# Altium PCB barricelli.PcbDoc (part 4 of 5)
Units mm, origin at the board's own origin, x right, y up, seen from the top; angles counter-clockwise.
Board outline 153 x 153 mm, 8 copper layers (Top Layer, PWR, Mid-Layer 1, Mid-Layer 2, Mid-Layer 3, Mid-Layer 4, GND, Bottom Layer); 168 components, 427 nets, 1233 pads, 911 vias.
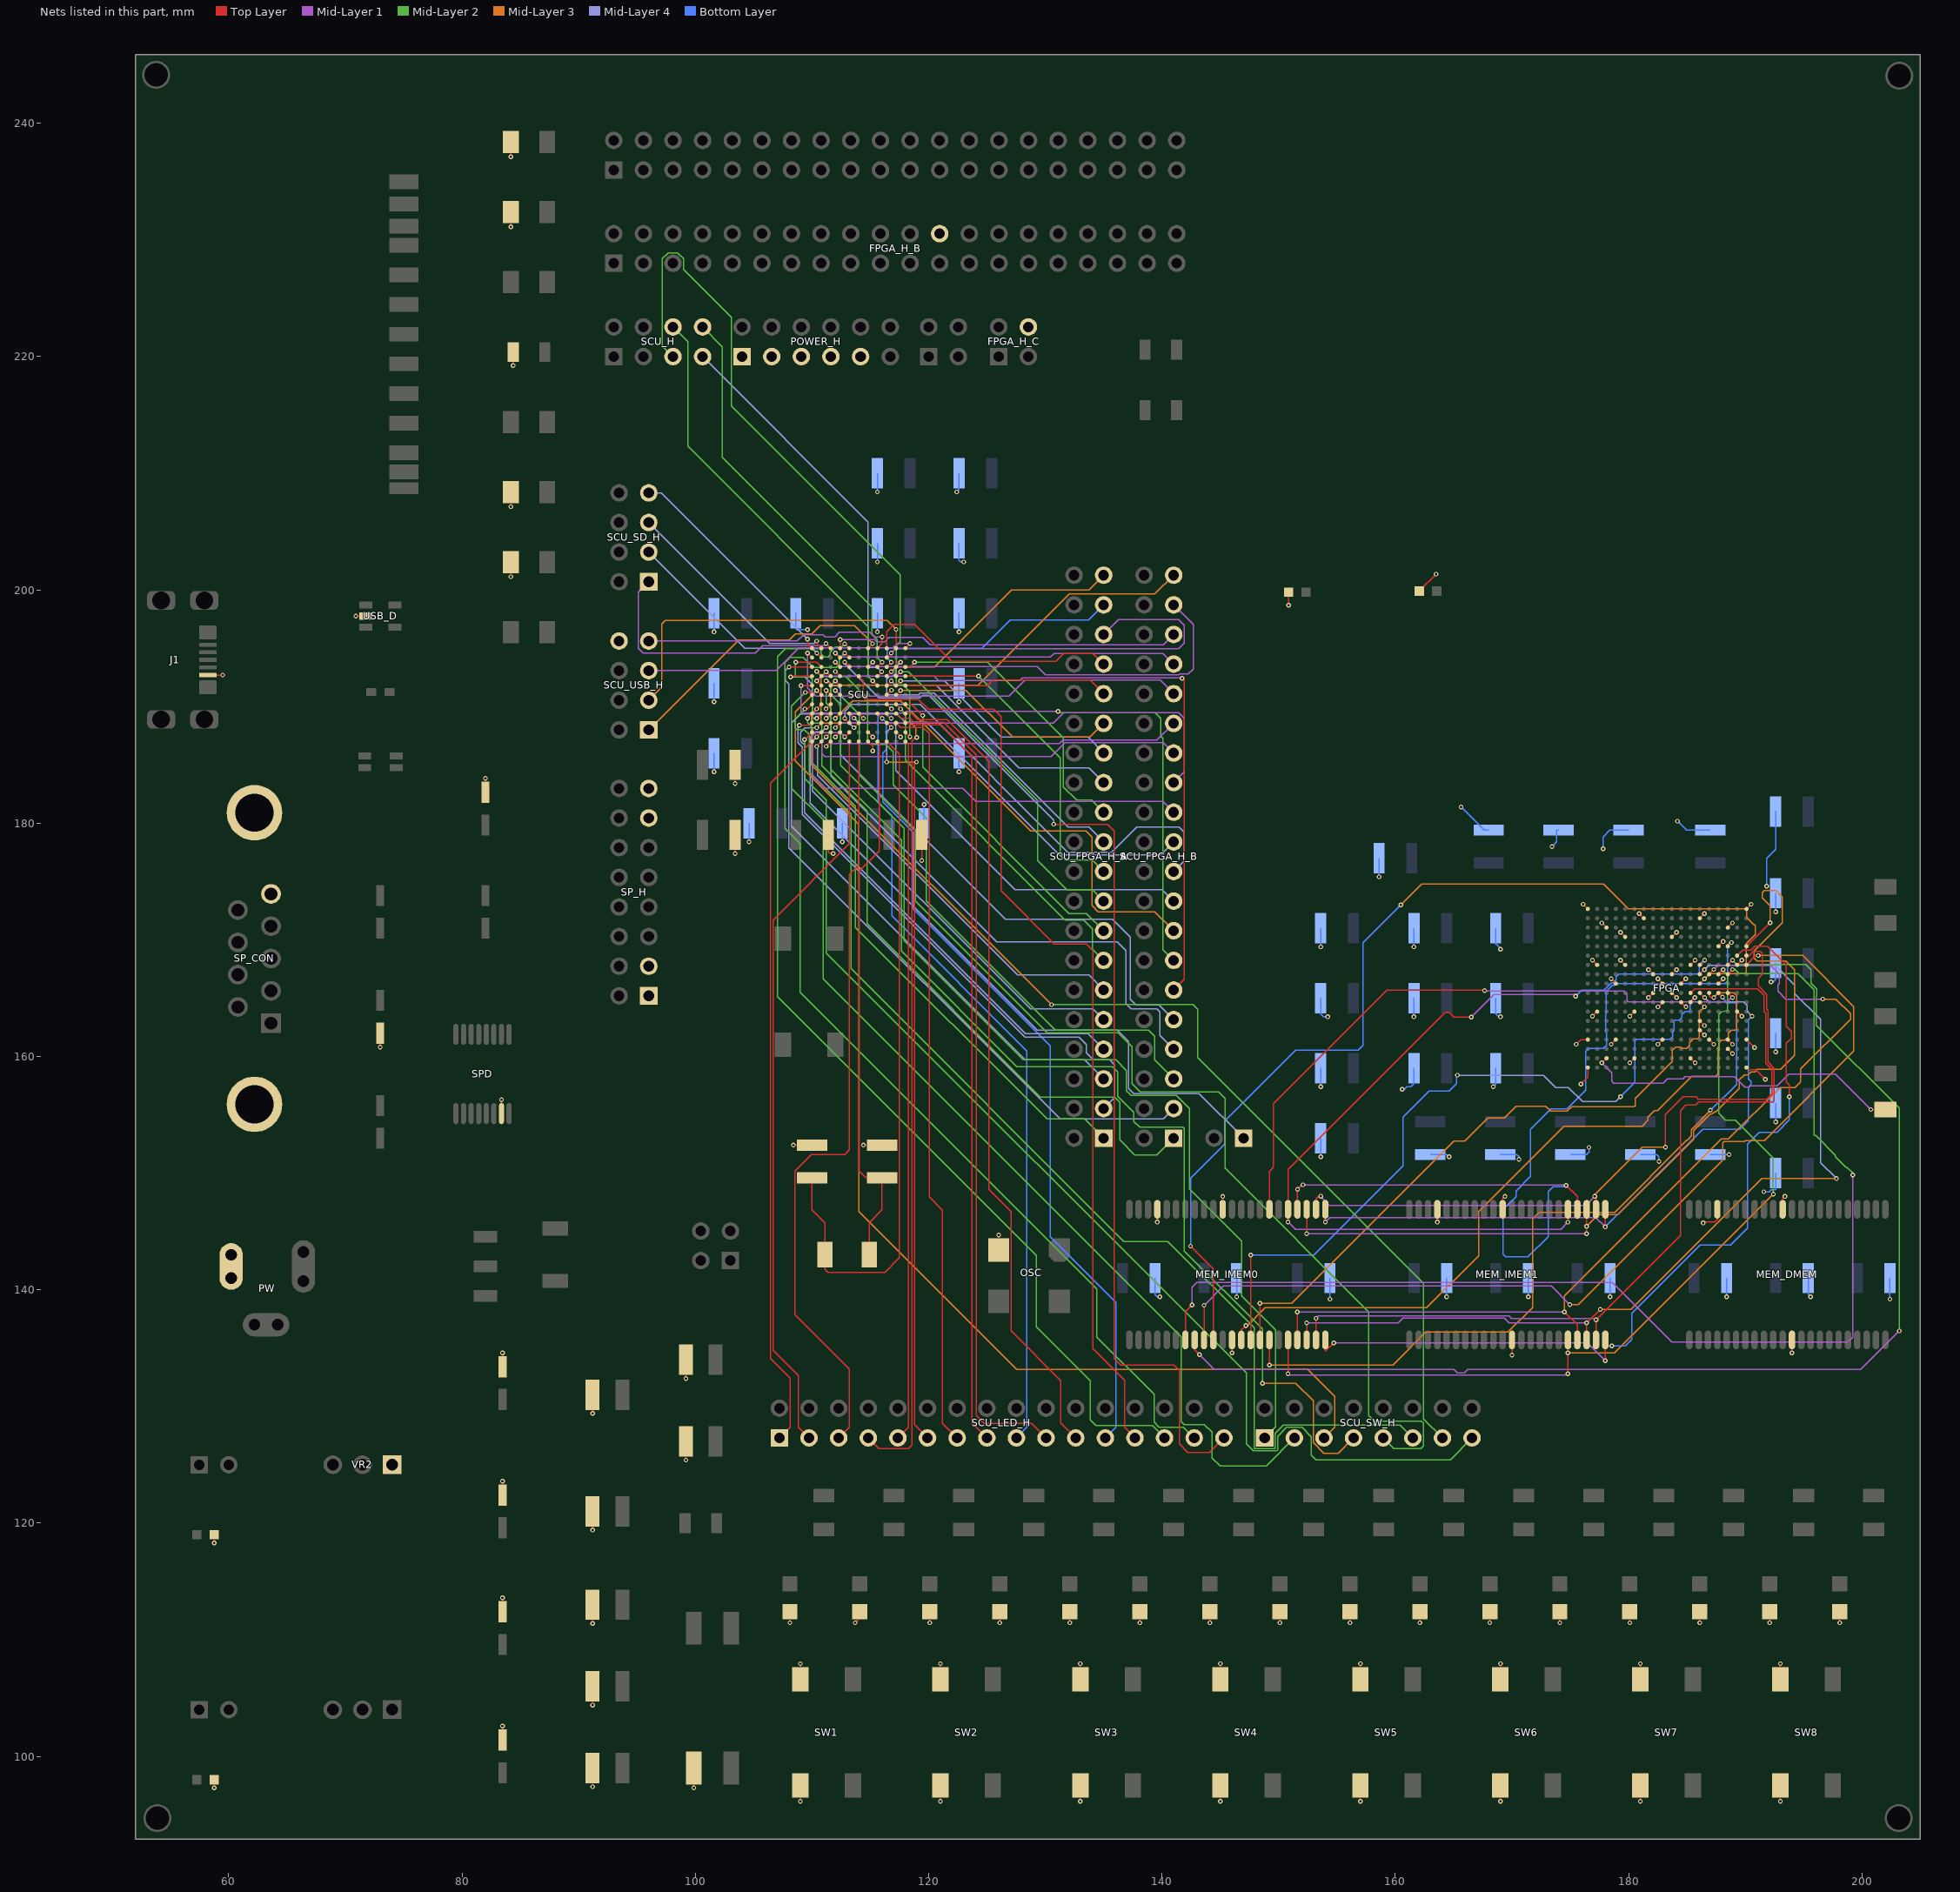
[diagram p10: the nets of this part, all layers, seen from the top]

## Via types
v1: diameter 0.4, hole 0.2, Top Layer to Bottom Layer, tented top, 896 vias
v2: diameter 0.4, hole 0.2, Top Layer to Bottom Layer, 14 vias
v3: diameter 0.6, hole 0.2, Top Layer to Bottom Layer, tented top, 1 vias

## Nets (pads, with @x,y where several pads share a name; then routed paths per layer and width w, separated by ;. In a path a pad name is that pad's centre, name@x,y a point inside that pad or via, vN(x,y) a via of type N, cw(c..) or ccw(c..) an arc to the next point about the centre after c; other vN are vias at no path point) (continued)
FPGA_INSTADDR9: FPGA.G13 MEM_IMEM0.27 MEM_IMEM1.27 | length 75.1
  Top Layer w0.1: v1(150.8,145.821) MEM_IMEM0.27@150.8,146.9 150.8,150.317 164.262,163.779 164.61,163.779 165.016,163.373 v1(166.522,163.373) ; v1(174.8,145.796) MEM_IMEM1.27@174.8,146.9 ; FPGA.G13@186.1,167.85 186.258,167.85 v1(186.512,168.25)
  Mid-Layer 1 w0.1: v1(150.8,145.821) 151.435,145.186 174.19,145.186 v1(174.8,145.796) ; v1(166.522,163.373) 168.45,165.3 175.587,165.3 175.462,165.175 v1(175.45,165.175)
  Bottom Layer w0.1: v1(175.45,165.175) 175.462,165.175 175.971,165.684 177.876,165.684 178.492,166.3 178.645,166.3 178.943,166.598 178.943,166.827 179.172,167.056 185.877,167.056 186.055,167.234 186.055,167.843 186.461,168.25 v1(186.512,168.25)
FPGA_INSTADDR10: FPGA.E16 MEM_IMEM0.26 MEM_IMEM1.26 | length 81.3
  Top Layer w0.1: MEM_IMEM0.26@151.6,146.9 151.6,148.603 v1(151.613,148.615) 151.997,149 v1(152.075,149) ; v1(174.64,148.956) 175.6,147.996 MEM_IMEM1.26@175.6,146.9 ; FPGA.E16@188.5,169.45 188.5,169.647 188.595,169.647 188.798,169.85 188.8,169.848 v1(188.8,169.775)
  Mid-Layer 1 w0.1: v1(151.613,148.615) v1@151.972,148.975 ; v1(152.075,149) 151.997,149 v1@151.972,148.975 ; v1(174.64,148.956) v1@174.539,148.956 ; v1@174.65,148.844 v1@174.539,148.956 ; v1@151.972,148.975 174.519,148.975 v1@174.539,148.956
  Bottom Layer w0.1: v1@174.65,148.844 173.507,148.844 173.1,148.437 173.1,144.55 171.374,142.824 169.469,142.824 169.24,143.053 169.24,146.888 170.343,147.991 170.343,148.478 171.577,149.712 171.577,153.738 173.338,155.499 174.727,155.499 176.327,157.099 176.327,160.426 176.581,160.68 177.825,160.68 178.1,160.955 178.1,162.045 178.049,162.096 178.049,163.595 178.054,163.6 178.054,165.579 178.575,166.1 178.728,166.1 178.878,166.25 188.297,166.25 188.468,166.421 188.468,169.52 188.798,169.85 188.8,169.848 v1(188.8,169.775)
FPGA_INSTADDR11: FPGA.E18 MEM_IMEM0.25 MEM_IMEM1.25 | length 78.1
  Top Layer w0.1: v1(152.4,144.805) MEM_IMEM0.25@152.4,146.9 ; v1(176.4,144.805) v1(176.4,145.44) MEM_IMEM1.25@176.4,146.9 ; FPGA.E18@190.1,169.45 v1(192.126,171.476)
  Mid-Layer 1 w0.1: v1(152.4,144.805) v1(176.4,144.805)
  Mid-Layer 3 w0.1: v1(176.4,145.44) 177.391,146.431 179.09,146.431 185.564,152.905 185.564,153.632 186.981,155.05 187.145,155.05 187.35,155.255 187.48,155.255 189.498,157.273 189.498,157.991 189.928,158.421 190.209,158.421 190.482,158.694 190.819,158.694 191.027,158.902 193.04,158.902 194.234,160.096 194.234,167.437 193.472,168.199 191.008,168.199 190.754,168.453 190.754,169.037 193.167,171.45 193.167,173.685 192.634,174.219 191.618,174.219 191.44,174.041 191.44,173.609 192.126,172.923 v1(192.126,171.476)
FPGA_INSTADDR12: FPGA.K12 MEM_IMEM0.24 MEM_IMEM1.24 | length 62.9
  Top Layer w0.1: MEM_IMEM0.24@153.2,146.9 153.2,147.79 153.416,148.006 153.644,148.006 153.65,148 153.6,148 v1(153.6,148.025) ; v1(177.089,148.006) 177.2,147.895 MEM_IMEM1.24@177.2,146.9 ; v1(183.159,152.222) 183.159,155.016 184.689,156.546 185.781,156.546 185.99,156.337 191.821,156.337 192.269,156.785 192.269,158.908 191.739,159.438 191.739,163.723 191.618,163.844 191.618,165.227 191.033,165.811 185.661,165.811 FPGA.K12@185.3,165.45
  Mid-Layer 1 w0.1: v1(153.6,148.025) 153.6,148 153.56,148 154.316,147.244 176.327,147.244 v1(177.089,148.006)
  Mid-Layer 3 w0.1: v1@177.075,148.135 181.162,152.222 v1(183.159,152.222)
FPGA_INSTADDR13: FPGA.K13 MEM_IMEM0.23 MEM_IMEM1.23 | length 58
  Top Layer w0.1: v1(154,145.821) MEM_IMEM0.23@154,146.9 ; v1(178,145.39) MEM_IMEM1.23@178,146.9 ; FPGA.K13@186.1,165.45 186.501,165.049 v1(186.512,165.049)
  Mid-Layer 1 w0.1: v1(154,145.821) 154.375,146.197 177.193,146.197 v1(178,145.39)
  Mid-Layer 4 w0.1: v1(186.512,165.049) 186.868,164.694 189.84,164.694 190.144,164.389 190.144,163.881 v1(190.576,163.449)
  Bottom Layer w0.1: v1(178,145.39) 186.357,153.746 189.535,153.746 190.271,154.483 190.271,157.351 190.5,157.58 190.5,157.87 190.271,158.099 190.271,163.144 v1(190.576,163.449)
FPGA_INSTADDR14: FPGA.F17 MEM_IMEM0.22 MEM_IMEM1.22 | length 76
  Top Layer w0.1: MEM_IMEM0.22@154,135.7 154,134.722 v1(154.737,135.458) ; v1(178,133.909) MEM_IMEM1.22@178,135.179 ; MEM_IMEM1.22@178,135.7 MEM_IMEM1.22@178,135.179 ; v1(178.562,135.179) MEM_IMEM1.22@178,135.179 ; FPGA.F17@189.3,168.65 189.77,169.12 190.475,169.12 190.823,169.469 191.89,169.469 193.523,167.836 193.523,162.586 193.946,162.163 193.946,161.561 193.523,161.138 193.523,157.81 193.777,157.556 v1(193.777,156.54)
  Mid-Layer 1 w0.1: v1(154.737,135.458) 176.451,135.458 v1(178,133.909)
  Bottom Layer w0.1: v1(178.562,135.179) 179.705,135.179 180.264,135.738 180.264,137.973 186.111,143.82 188.728,143.82 190.195,145.288 190.195,152.476 191.211,153.492 192.71,153.492 193.777,154.559 v1(193.777,156.54)
FPGA_INSTADDR15: FPGA.F18 MEM_IMEM0.21 MEM_IMEM1.21 | length 72.1
  Top Layer w0.1: MEM_IMEM0.21@153.2,135.7 v1(153.2,137.553) ; MEM_IMEM1.21@177.2,135.7 v1(177.2,137.414) 184.444,144.658 184.444,155.366 184.912,155.835 185.745,155.835 186.031,156.121 192.426,156.121 192.469,156.164 192.469,158.994 191.939,159.524 191.939,163.923 191.818,164.044 191.818,165.332 191.106,166.044 191.106,166.704 191.46,167.058 191.46,168.859 191.313,169.006 190.677,169.006 190.321,168.65 FPGA.F18@190.1,168.65
  Mid-Layer 1 w0.1: v1(153.2,137.553) 153.403,137.756 169.75,137.756 169.953,137.553 177.061,137.553 v1(177.2,137.414)
FPGA_INSTADDR16: FPGA.H13 MEM_IMEM0.20 MEM_IMEM1.20 | length 81.1
  Top Layer w0.1: MEM_IMEM0.20@152.4,135.7 v1(152.4,137.16) ; MEM_IMEM1.20@176.4,135.7 v1@176.4,137.157 ; v1(176.4,137.16) v1@176.4,137.157 ; v1(177.571,138.328) v1@176.4,137.157 ; FPGA.H13@186.1,167.05 186.512,167.462 v1(186.5,167.45)
  Mid-Layer 1 w0.1: v1(152.4,137.16) 160.257,137.16 160.653,137.556 169.347,137.556 169.743,137.16 v1(176.4,137.16)
  Mid-Layer 3 w0.1: v1(177.571,138.328) 180.213,138.328 191.414,149.53 v1(197.815,149.53)
  Mid-Layer 4 w0.1: v1(186.5,167.45) 186.868,167.818 192.558,167.818 194.228,166.148 194.228,165.397 196.444,163.181 196.444,150.901 v1(197.815,149.53)
FPGA_INSTADDR17: FPGA.H14 MEM_IMEM0.19 MEM_IMEM1.19 | length 80.2
  Top Layer w0.1: MEM_IMEM0.19@151.6,135.7 v1(151.6,138.1) ; v1(174.498,138.1) 175.6,136.998 MEM_IMEM1.19@175.6,135.7 ; FPGA.H14@186.9,167.05 187.3,167.45 v1(187.3,167.462)
  Mid-Layer 1 w0.1: v1(151.6,138.1) v1(174.498,138.1) ; v1(187.3,167.462) 187.65,167.812 192.151,167.812 192.913,167.05 192.913,166.247 192.786,166.12 192.786,165.602 193.466,164.922 v1(196.647,164.922)
  Mid-Layer 3 w0.1: v1(174.498,138.1) 174.498,139.473 187.95,152.925 188.561,152.925 192.989,157.353 194.259,157.353 194.742,157.836 194.742,158.924 199.009,163.191 199.009,163.678 197.764,164.922 v1(196.647,164.922)
FPGA_INSTADDR18: FPGA.H15 MEM_IMEM0.18 MEM_IMEM1.18 | length 76.1
  Top Layer w0.1: v1(150.8,132.791) MEM_IMEM0.18@150.8,135.7 ; v1(174.8,132.791) v1(174.8,134.595) MEM_IMEM1.18@174.8,135.7 ; FPGA.H15@187.7,167.05 v1@188.112,167.462 ; v1(188.1,167.45) v1@188.112,167.462
  Mid-Layer 1 w0.1: v1(150.8,132.791) 150.918,132.673 174.682,132.673 v1(174.8,132.791)
  Mid-Layer 2 w0.1: v1(188.1,167.45) 188.112,167.462 188.112,167.361 188.468,167.005 188.468,163.932 187.96,163.83 187.731,163.601 187.731,155.118 188.296,154.553 189.134,154.553 192.405,151.282 v1(192.405,148.209)
  Mid-Layer 3 w0.1: v1(174.8,134.595) 178.791,134.595 v1(192.405,148.209)
GND: C4.1 C5.1 C6.1 C7.1 C8.2 C9.2 C10.2 C11.1 C12.1 C13.1 C14.2 C15.1 C16.2 C17.2 C18.2 C19.2 C20.2 C21.2 C22.2 C23.2 C24.2 C25.2 C26.2 C27.2 C28.2 C29.2 C30.2 C31.2 C32.2 C33.2 C34.2 C35.2 C36.2 C37.2 C38.2 C39.2 C40.2 C41.2 C42.2 C43.2 C44.2 C45.2 C46.2 C47.2 C48.2 C49.2 C50.2 C51.2 C52.2 C53.2 C54.2 C55.2 C56.2 C57.2 C58.2 C59.2 C60.2 C61.2 C62.2 C63.2 C64.2 C65.2 C66.2 E3.1 E5.2 E8.2 E9.2 E10.2 E11.2 FPGA.A1 FPGA.A18 FPGA.B7 FPGA.B13 FPGA.C3 FPGA.C16 FPGA.D5 FPGA.D10 FPGA.E15 FPGA.G2 FPGA.G5 FPGA.G12 FPGA.G17 FPGA.H8 FPGA.H10 FPGA.J4 FPGA.J9 FPGA.J11 FPGA.J15 FPGA.K8 FPGA.K10 FPGA.L9 FPGA.L11 FPGA.M2 FPGA.M6 FPGA.M17 FPGA.N13 FPGA.P13 FPGA.R1 FPGA.R4 FPGA.R9 FPGA.R14 FPGA.R16 FPGA.R18 FPGA.T16 FPGA.U6 FPGA.U12 FPGA.V1 FPGA.V18 FPGA_H_B.24 FPGA_H_C.4 J1.5 LED2.2 LED4.2 LED5.2 LED6.2 LED7.2 LED8.2 LED9.2 LED10.2 LED11.2 LED12.2 LED13.2 LED14.2 LED15.2 LED16.2 LED17.2 LED18.2 LED19.2 LED20.2 LED21.2 LED22.2 MEM_DMEM.12 MEM_DMEM.34 MEM_DMEM.41 MEM_IMEM0.12 MEM_IMEM0.34 MEM_IMEM0.41 MEM_IMEM1.12 MEM_IMEM1.34 MEM_IMEM1.41 OSC.2 POWER_H.1 POWER_H.3 POWER_H.5 POWER_H.7 POWER_H.9 PW.2 PW.2A PW.2B R31.1 R33.2 R34.2 R36.2 R38.2 R39.2 SCU.C7 SCU.D4 SCU.F9 SCU.G3 SCU.G9 SCU.H6 SCU.K4 SCU.K7 SCU.K10 SCU.L7 SCU_USB_H.8 SP_CON.5 SP_CON.10 SP_CON.11 SP_H.1 SP_H.3 SP_H.13 SP_H.15 SPD.15 SW1.3 SW1.4 SW2.3 SW2.4 SW3.3 SW3.4 SW4.3 SW4.4 SW5.3 SW5.4 SW6.3 SW6.4 SW7.3 SW7.4 SW8.3 SW8.4 USB_D.2 VR2.1 | length 223.3
  Top Layer w0.1: J1.5@58.2,192.7 v1@59.45,192.7 ; v1(58.75,97.3) LED4.2@58.75,98 ; v1(58.75,118.3) LED2.2@58.75,119 ; v1(70.891,197.75) USB_D.2@71.75,197.75 ; v1(72.975,160.8) E3.1@72.975,162 ; E5.2@82,182.65 v1(82,183.85) ; SPD.15@83.375,155.1 v1(83.375,156.3) ; E11.2@83.46,101.4 v1(83.46,102.6) ; E10.2@83.46,112.4 v1(83.46,113.6) ; E9.2@83.46,122.4 v1(83.46,123.6) ; E8.2@83.46,133.4 v1(83.46,134.6) ; v1(84.18,201.131) R34.2@84.18,202.381 ; v1(84.18,207.131) R33.2@84.18,208.381 ; v1(84.18,231.131) R38.2@84.18,232.381 ; v1(84.18,237.131) R36.2@84.18,238.381 ; v1(84.38,219.231) R39.2@84.38,220.381 ; v1(91.185,97.4) C11.1@91.185,99 ; v1(91.185,104.4) C12.1@91.185,106 ; v1(91.185,111.4) C13.1@91.185,113 ; v1(91.185,119.4) C6.1@91.185,121 ; v1(91.185,129.4) C4.1@91.185,131 ; v1(99.185,125.4) C7.1@99.185,127 ; v1(99.185,132.4) C5.1@99.185,134 ; v1(99.86,97.3) R31.1@99.86,99 ; v1(103.4,177.4) C18.2@103.4,179 ; v1(103.4,183.4) C19.2@103.4,185 ; v1(108.1,111.45) LED5.2@108.1,112.4 ; v1(108.4,152.4) C15.1@110,152.4 ; v1(109,96.15) SW1.3@109,97.5 ; SW1.4@109,106.6 v1(109,107.95) ; v1(111.2,189.8) SCU.G3@111.6,190.2 ; C17.2@111.4,179 111.4,177.557 111.557,177.4 v1(111.806,177.4) ; v1(112,187.4) SCU.K4@112.4,187.8 ; v1(112,193) SCU.D4@112.4,192.6 ; v1(113.694,111.45) 114.1,111.856 LED6.2@114.1,112.4 ; SCU.H6@114,189.4 v1(114.4,189) ; v1(114.4,152.4) C14.2@116,152.4 ; SCU.L7@114.8,187 115.2,186.6 v1(115.2,186.194) ; SCU.K7@114.8,187.8 v1(115.2,187.4) ; SCU.C7@114.8,193.4 v1(115.2,193.8) ; SCU.G9@116.4,190.2 v1(116.8,189.8) ; SCU.F9@116.4,191 v1(116.8,191.4) ; SCU.K10@117.2,187.8 v1(117.6,187.4) ; v1(119.4,176.79) C16.2@119.4,179 ; v1(120.1,111.45) LED7.2@120.1,112.4 ; v1(121,96.15) SW2.3@121,97.5 ; SW2.4@121,106.6 v1(121,107.95) ; OSC.2@126,143.4 v1(126,144.7) ; v1(126.1,111.45) LED8.2@126.1,112.4 ; v1(132.1,111.45) LED9.2@132.1,112.4 ; v1(133,96.15) SW3.3@133,97.5 ; SW3.4@133,106.6 v1(133,107.95) ; v1(138.1,111.45) LED10.2@138.1,112.4 ; v1(139.6,145.8) MEM_IMEM0.41@139.6,146.9 ; v1(144.1,111.45) LED11.2@144.1,112.4 ; v1(145,96.15) SW4.3@145,97.5 ; SW4.4@145,106.6 v1(145,107.95) ; MEM_IMEM0.34@145.2,146.9 v1(145.2,148) ; v1(146,134.6) MEM_IMEM0.12@146,135.7 ; v1(150.1,111.45) LED12.2@150.1,112.4 ; v1(150.85,198.675) LED22.2@150.85,199.8 ; v1(156.1,111.45) LED13.2@156.1,112.4 ; v1(157,96.15) SW5.3@157,97.5 ; SW5.4@157,106.6 v1(157,107.95) ; LED21.2@162.05,199.9 v1(163.5,201.35) ; v1(162.1,111.45) LED14.2@162.1,112.4 ; v1(163.6,145.8) MEM_IMEM1.41@163.6,146.9 ; v1(168.1,111.45) LED15.2@168.1,112.4 ; v1(169,96.15) SW6.3@169,97.5 ; SW6.4@169,106.6 v1(169,107.95) ; MEM_IMEM1.34@169.2,146.9 169.2,147.833 169.367,148 v1(169.403,148) ; v1(170,134.397) MEM_IMEM1.12@170,135.7 ; v1(174.1,111.45) LED16.2@174.1,112.4 ; v1(175.49,161.05) 175.89,161.45 FPGA.R1@176.5,161.45 ; v1(175.897,157.634) 176.5,158.237 FPGA.V1@176.5,159.05 ; v1(176.1,173.05) FPGA.A1@176.5,172.65 ; v1(176.9,163.45) FPGA.M2@177.3,163.85 ; v1(176.9,168.25) FPGA.G2@177.3,167.85 ; v1(177.7,171.45) FPGA.C3@178.1,171.05 ; v1(178.5,161.05) FPGA.R4@178.9,161.45 ; v1(178.5,166.65) FPGA.J4@178.9,166.25 ; v1(179.3,168.25) FPGA.G5@179.7,167.85 ; v1(179.3,170.65) FPGA.D5@179.7,170.25 ; v1(180.1,111.45) LED17.2@180.1,112.4 ; v1(180.1,159.45) FPGA.U6@180.5,159.85 ; v1(180.1,163.45) FPGA.M6@180.5,163.85 ; v1(180.9,172.25) FPGA.B7@181.3,171.85 ; v1(181,96.15) SW7.3@181,97.5 ; SW7.4@181,106.6 v1(181,107.95) ; v1(181.7,165.05) FPGA.K8@182.1,165.45 ; v1(181.7,167.45) FPGA.H8@182.1,167.05 ; v1(182.5,161.05) FPGA.R9@182.9,161.45 ; v1(182.5,164.25) FPGA.L9@182.9,164.65 ; v1(182.5,166.65) FPGA.J9@182.9,166.25 ; FPGA.K10@183.7,165.45 v1(184.1,165.05) ; FPGA.H10@183.7,167.05 v1(184.1,167.45) ; FPGA.D10@183.7,170.25 v1(184.1,170.65) ; FPGA.L11@184.5,164.65 184.9,164.25 v1@184.908,164.258 ; FPGA.J11@184.5,166.25 v1(184.9,166.65) ; FPGA.U12@185.3,159.85 v1(185.7,159.45) ; FPGA.G12@185.3,167.85 v1(185.7,168.25) ; v1(186.1,111.45) LED18.2@186.1,112.4 ; FPGA.P13@186.1,162.25 v1(186.5,161.85) ; FPGA.N13@186.1,163.05 v1(186.5,162.65) ; FPGA.B13@186.1,171.85 v1(186.5,172.25) ; v1(186.375,145.725) 186.375,145.794 186.381,145.8 187.35,145.8 187.6,146.05 MEM_DMEM.41@187.6,146.9 ; FPGA.R14@186.9,161.45 v1(187.3,161.05) ; FPGA.J15@187.7,166.25 v1(188.1,166.65) ; FPGA.E15@187.7,169.45 v1(188.1,169.85) ; FPGA.T16@188.5,160.65 v1(188.9,160.25) ; FPGA.R16@188.5,161.45 v1(188.9,161.05) ; FPGA.C16@188.5,171.05 v1(188.9,171.45) ; FPGA.M17@189.3,163.85 v1(189.7,163.45) ; FPGA.G17@189.3,167.85 v1(189.7,168.25) ; FPGA.V18@190.1,159.05 190.281,158.869 190.89,158.869 v1(191.719,158.04) ; FPGA.R18@190.1,161.45 190.703,160.847 190.703,160.644 190.775,160.715 v1(190.775,160.775) ; FPGA.A18@190.1,172.65 v1(190.5,173.05) ; v1(192.1,111.45) LED19.2@192.1,112.4 ; v1(193,96.15) SW8.3@193,97.5 ; SW8.4@193,106.6 v1(193,107.95) ; MEM_DMEM.34@193.2,146.9 193.2,147.855 193.345,148 v1(193.403,148) ; v1(194,134.6) MEM_DMEM.12@194,135.7 ; v1(198.1,111.45) LED20.2@198.1,112.4
  Bottom Layer w0.1: v1(101.6,184.4) C57.2@101.6,186 ; v1(101.6,190.4) C56.2@101.6,192 ; v1(101.6,196.4) C55.2@101.6,198 ; v1(104.6,178.4) C44.2@104.6,180 ; C54.2@108.6,198 108.6,196.698 108.694,196.603 v1(109.616,196.603) ; v1(112.6,178.4) C43.2@112.6,180 ; v1(115.6,196.4) C53.2@115.6,198 ; v1(115.6,202.4) C52.2@115.6,204 ; v1(115.6,208.4) C51.2@115.6,210 ; C45.2@119.6,180 v1(119.6,181.6) ; v1(122.397,208.4) 122.6,208.603 C50.2@122.6,210 ; v1(122.6,184.4) C46.2@122.6,186 ; v1(122.6,190.4) C47.2@122.6,192 ; v1(122.6,196.4) C48.2@122.6,198 ; C49.2@122.6,204 122.6,202.533 122.733,202.4 v1(123.006,202.4) ; C42.2@139.4,141 139.4,139.598 139.598,139.4 v1(139.806,139.4) ; v1(146.4,139.4) C41.2@146.4,141 ; v1(153.6,151.4) C66.2@153.6,153 ; v1(153.6,157.4) C65.2@153.6,159 ; C64.2@153.6,165 153.6,163.622 153.822,163.4 v1(154.21,163.4) ; v1(153.6,169.4) C63.2@153.6,171 ; v1(154.4,139.197) C40.2@154.4,141 ; v1(158.6,175.4) C62.2@158.6,177 ; v1(160.584,157.197) 160.787,157.197 160.99,157.4 161.341,157.4 161.6,157.659 C59.2@161.6,159 ; v1(161.6,163.4) C60.2@161.6,165 ; v1(161.6,169.4) C61.2@161.6,171 ; C31.2@163,151.6 164.397,151.6 v1(164.6,151.397) ; v1(164.4,139.4) C39.2@164.4,141 ; v1(165.633,181.381) 165.659,181.381 167.64,179.4 C26.2@168,179.4 ; v1(168.397,157.4) 168.6,157.603 C32.2@168.6,159 ; C33.2@168.6,165 168.6,163.659 168.859,163.4 v1(169.006,163.4) ; C58.2@168.6,171 168.6,169.659 169.006,169.253 v1(169.006,169.197) ; C30.2@169,151.6 170.397,151.6 170.6,151.397 v1(170.6,151.194) ; v1(171.4,139.4) C38.2@171.4,141 ; v1(173.431,178.003) 173.838,178.41 173.838,179.4 C24.2@174,179.4 ; C29.2@175,151.6 176.378,151.6 176.6,151.822 v1(176.6,152.21) ; v1(177.8,177.8) 177.8,178.816 178.384,179.4 C23.2@180,179.4 ; v1(178.4,139.4) C37.2@178.4,141 ; C28.2@181,151.6 182.397,151.6 182.6,151.397 v1(182.6,150.99) ; v1@184.175,180.264 184.175,180.188 184.963,179.4 C22.2@187,179.4 ; C27.2@187,151.6 v1(188.6,151.6) ; v1(188.4,139.4) C36.2@188.4,141 ; v1(191.584,148.4) 192.055,148.4 192.214,148.559 192.6,148.559 C25.2@192.6,150 ; v1(191.821,174.593) 191.821,176.989 192.6,177.769 C21.2@192.6,181 ; v1(192.194,166.4) 192.397,166.4 192.6,166.603 C10.2@192.6,168 ; v1(192.6,154.4) C8.2@192.6,156 ; v1(192.6,160.4) C9.2@192.6,162 ; v1(192.6,172.4) C20.2@192.6,174 ; C35.2@195.4,141 195.4,139.603 v1(195.603,139.4) ; v1(202.4,139.197) C34.2@202.4,141
  other v1: 184.909,164.258 184.175,180.175 59.475,192.7
H_BTN0: SCU.E4 SCU_SW_H.1 | length 88.8
  Top Layer w0.1: v1(111.989,192.202) 111.998,192.202 SCU.E4@112.4,191.8
  Mid-Layer 2 w0.1: v1(111.989,192.202) 111.582,191.795 111.582,191.059 112.446,190.195 112.446,184.982 117.881,179.546 117.881,169.926 128.092,159.715 136.042,159.715 136.957,158.801 136.957,157.074 137.363,156.667 141.224,156.667 142.342,155.55 142.342,148.641 146.828,144.154 146.828,139.481 149.733,136.576 149.733,128.233 SCU_SW_H.1@148.8,127.3
H_BTN1: SCU.F1 SCU_SW_H.3 | length 91.1
  Top Layer w0.1: v1(109.423,191.211) 109.789,191.211 SCU.F1@110,191
  Mid-Layer 2 w0.1: v1(109.423,191.211) 108.229,190.017 108.229,183.007 110.947,180.289 110.947,166.675 141.656,135.966 141.656,128.687 141.894,128.449 143.636,128.449 144.297,127.787 144.297,125.578 144.983,124.892 148.932,124.892 SCU_SW_H.3@151.34,127.3
H_BTN2: SCU.F2 SCU_SW_H.5 | length 99.6
  Top Layer w0.1: v1(110.388,191.389) 110.411,191.389 SCU.F2@110.8,191
  Mid-Layer 3 w0.1: v1(110.388,191.389) 108.56,189.56 108.56,185.344 113.995,179.908 113.995,146.71 127.533,133.172 152.476,133.172 154.788,130.861 154.788,128.208 SCU_SW_H.5@153.88,127.3
H_BTN3: SCU.F3 SCU_SW_H.7 | length 95.4
  Top Layer w0.1: v1(111.201,191.389) 111.211,191.389 SCU.F3@111.6,191
  Mid-Layer 2 w0.1: v1(111.201,191.389) 111.201,190.297 111.633,189.865 111.633,184.582 117.653,178.562 117.653,169.037 127.559,159.131 135.738,159.131 136.195,158.674 136.195,156.591 137.592,155.194 137.592,154.432 138.1,153.924 141.808,153.924 141.91,153.822 141.91,143.332 148.615,136.627 v1(148.615,131.978)
  Mid-Layer 3 w0.1: v1(148.615,131.978) 151.46,131.978 152.959,130.48 152.959,126.91 153.885,125.984 155.104,125.984 SCU_SW_H.7@156.42,127.3
H_BTN4: SCU.F4 SCU_SW_H.9 | length 100
  Top Layer w0.1: v1(111.989,191.389) 112.011,191.389 SCU.F4@112.4,191
  Mid-Layer 2 w0.1: v1(111.989,191.389) 114.046,189.332 114.046,184.147 118.872,179.321 118.872,173.317 130.162,162.027 136.246,162.027 137.414,160.858 137.414,157.683 138.151,156.947 144.856,156.947 145.39,156.413 145.39,150.419 157.709,138.1 157.709,129.235 158.191,128.753 162.23,128.753 162.408,128.575 162.408,126.619 162.189,126.4 159.86,126.4 SCU_SW_H.9@158.96,127.3
H_BTN5: SCU.G1 SCU_SW_H.11 | length 99
  Top Layer w0.1: v1(109.398,189.789) 109.589,189.789 SCU.G1@110,190.2
  Mid-Layer 2 w0.1: v1(109.398,189.789) 108.56,188.951 108.56,188.163 108.687,188.036 109.322,188.036 109.753,187.604 109.753,184.353 113.335,180.772 113.335,167.538 136.728,144.145 140.5,144.145 147.9,136.745 147.9,126.4 149.7,126.4 149.7,127.704 150.396,128.4 160.4,128.4 SCU_SW_H.11@161.5,127.3
H_BTN6: SCU.G2 SCU_SW_H.13 | length 92.7
  Top Layer w0.1: v1(110.389,189.789) SCU.G2@110.8,190.2
  Mid-Layer 2 w0.1: v1(130.531,164.44) 142.646,164.44 143.053,164.033 143.053,159.922 162.408,140.567 162.408,128.932 SCU_SW_H.13@164.04,127.3
  Mid-Layer 3 w0.1: v1(110.389,189.789) 109.957,189.357 109.957,185.014 v1(130.531,164.44)
H_BTN7: SCU.K1 SCU_SW_H.15 | length 101
  Top Layer w0.1: v1(109.35,187.175) 109.375,187.175 SCU.K1@110,187.8
  Mid-Layer 2 w0.1: v1(109.35,187.175) 109.375,187.175 109.398,187.198 109.398,183.82 111.227,181.991 111.227,168.859 147.218,132.867 147.218,126.797 147.828,126.187 149.809,126.187 149.911,126.289 149.911,127.432 150.679,128.2 151.994,128.2 152.799,127.395 152.799,125.839 153.213,125.425 164.705,125.425 SCU_SW_H.15@166.58,127.3
H_FPGA_ADDR0: SCU.H1 SCU_FPGA_H_A.1 | length 49
  Top Layer w0.1: v1(109.601,189.001) SCU.H1@110,189.4
  Mid-Layer 2 w0.1: v1(109.601,189.001) 109.601,188.632 110.007,188.226 110.007,185.166 113.716,181.458 113.716,171.069 130.15,154.635 133.365,154.635 SCU_FPGA_H_A.1@135,153
H_FPGA_ADDR1: SCU.J1 SCU_FPGA_H_A.3 | length 49.2
  Top Layer w0.1: v1(108.915,188.392) 109.792,188.392 SCU.J1@110,188.6
  Mid-Layer 4 w0.1: v1(108.915,188.392) 108.8,188.277 108.8,186.897 109.153,186.544 109.153,180.762 128.27,161.646 132.893,161.646 133.502,161.036 133.502,160.325 134.112,159.715 135.509,159.715 135.915,159.309 135.915,156.455 SCU_FPGA_H_A.3@135,155.54
H_FPGA_ADDR2: SCU.H2 SCU_FPGA_H_A.5 | length 47.8
  Top Layer w0.1: v1(110.388,189.001) 110.401,189.001 SCU.H2@110.8,189.4
  Mid-Layer 4 w0.1: v1(110.388,189.001) 110.123,189.001 109.768,189.357 109.017,189.357 108.229,188.57 108.229,179.73 128.245,159.715 133.365,159.715 SCU_FPGA_H_A.5@135,158.08
H_FPGA_ADDR3: SCU.J2 SCU_FPGA_H_A.7 | length 43.2
  Top Layer w0.1: v1(110.388,188.189) SCU.J2@110.8,188.6
  Mid-Layer 4 w0.1: v1(110.388,188.189) 109.397,188.189 109,187.792 109,187.03 109.205,186.825 109.272,186.825 109.353,186.744 109.353,180.918 128.295,161.976 133.644,161.976 SCU_FPGA_H_A.7@135,160.62
H_FPGA_ADDR4: SCU.K2 SCU_FPGA_H_A.9 | length 38.4
  Top Layer w0.1: v1(110.401,187.401) SCU.K2@110.8,187.8
  Mid-Layer 4 w0.1: v1(110.401,187.401) 110.033,187.033 110.033,182.778 128.727,164.084 134.076,164.084 SCU_FPGA_H_A.9@135,163.16
H_FPGA_ADDR5: SCU.L2 SCU_FPGA_H_A.11 | length 35.2
  Top Layer w0.1: v1(110.388,186.588) SCU.L2@110.8,187
  Mid-Layer 4 w0.1: v1(110.388,186.588) 110.477,186.499 110.477,184.112 127.61,166.98 133.72,166.98 SCU_FPGA_H_A.11@135,165.7
H_FPGA_ADDR6: SCU.G10 SCU_FPGA_H_A.13 | length 30.3
  Top Layer w0.1: SCU.G10@117.2,190.2 117.602,189.798 v1(117.602,189.789)
  Mid-Layer 2 w0.1: v1(117.602,189.789) 118.008,189.382 118.008,185.395 131.699,171.704 133.299,171.704 134.052,170.951 134.052,169.188 SCU_FPGA_H_A.13@135,168.24
H_FPGA_ADDR7: SCU.G11 SCU_FPGA_H_A.15 | length 27.6
  Top Layer w0.1: SCU.G11@118,190.2 118.51,190.2 v1(119.48,189.23)
  Mid-Layer 2 w0.1: v1(119.48,189.23) 119.48,184.806 132.023,172.263 133.517,172.263 SCU_FPGA_H_A.15@135,170.78
H_FPGA_ADDR8: SCU.D10 SCU_FPGA_H_A.17 | length 29.1
  Top Layer w0.1: SCU.D10@117.2,192.6 v1(117.589,192.989)
  Mid-Layer 2 w0.1: v1(117.589,192.989) 118.279,192.989 129.337,181.931 129.337,176.784 131.826,174.295 134.025,174.295 SCU_FPGA_H_A.17@135,173.32
H_FPGA_ADDR9: SCU.D11 SCU_FPGA_H_A.19 | length 28.8
  Top Layer w0.1: SCU.D11@118,192.6 v1(124.257,192.6)
  Mid-Layer 2 w0.1: v1(124.257,192.6) 131.267,185.59 131.267,177.241 131.674,176.835 134.025,176.835 SCU_FPGA_H_A.19@135,175.86
H_FPGA_ADDR10: SCU.C10 SCU_FPGA_H_A.21 | length 28
  Top Layer w0.1: SCU.C10@117.2,193.4 117.2,193.654 117.348,193.802 v1(117.602,193.802)
  Mid-Layer 4 w0.1: v1(117.602,193.802) 117.145,193.345 117.145,192.837 116.891,192.583 116.637,192.583 116.408,192.354 116.408,191.211 116.611,191.008 119.126,191.008 119.287,191.169 120.473,191.169 131.963,179.68 133.72,179.68 SCU_FPGA_H_A.21@135,178.4
H_FPGA_ADDR11: SCU.C11 SCU_FPGA_H_A.23 | length 25
  Top Layer w0.1: SCU.C11@118,193.4 118.394,193.4 v1(118.796,193.802)
  Mid-Layer 2 w0.1: v1(118.796,193.802) 125.046,193.802 131.547,187.302 131.547,183.109 132.69,181.966 133.974,181.966 SCU_FPGA_H_A.23@135,180.94
H_FPGA_ADDR12: SCU.E9 SCU_FPGA_H_A.25 | length 22.4
  Top Layer w0.1: SCU.E9@116.4,191.8 116.789,192.189 v1(116.789,192.202)
  Mid-Layer 4 w0.1: v1(116.789,192.202) 117.157,191.834 120.636,191.834 127.737,184.734 133.746,184.734 SCU_FPGA_H_A.25@135,183.48
H_FPGA_ADDR13: SCU.E10 SCU_FPGA_H_A.27 | length 20.5
  Top Layer w0.1: SCU.E10@117.2,191.8 v1(117.602,192.202)
  Mid-Layer 4 w0.1: v1(117.602,192.202) 121.361,192.202 126.187,187.376 133.644,187.376 SCU_FPGA_H_A.27@135,186.02
H_FPGA_ADDR14: SCU.F10 SCU_FPGA_H_A.29 | length 20.1
  Top Layer w0.1: SCU.F10@117.2,191 v1(117.589,191.389)
  Mid-Layer 3 w0.1: v1(117.589,191.389) 123.19,191.389 127.203,187.376 133.816,187.376 SCU_FPGA_H_A.29@135,188.56
H_FPGA_ADDR15: SCU.E11 SCU_FPGA_H_A.31 | length 17.7
  Top Layer w0.1: SCU.E11@118,191.8 125.044,191.8 125.502,192.258 133.842,192.258 SCU_FPGA_H_A.31@135,191.1
H_FPGA_ADDR16: SCU.A9 SCU_FPGA_H_A.33 | length 22.3
  Top Layer w0.1: SCU.A9@116.4,195 116.4,196.41 117.043,197.053 118.77,197.053 121.945,193.878 130.886,193.878 131.572,194.564 134.076,194.564 SCU_FPGA_H_A.33@135,193.64
H_FPGA_ADDR17: SCU.B9 SCU_FPGA_H_A.35 | length 35.2
  Top Layer w0.1: SCU.B9@116.4,194.2 v1(116.789,194.589)
  Mid-Layer 1 w0.1: v1(116.789,194.589) 117.139,194.939 141.422,194.939 141.91,195.428 141.91,196.977 141.427,197.46 136.28,197.46 SCU_FPGA_H_A.35@135,196.18
H_FPGA_ADDR18: SCU.C9 SCU_FPGA_H_A.37 | length 21.9
  Top Layer w0.1: SCU.C9@116.4,193.4 116.789,193.789 v1(116.789,193.802)
  Bottom Layer w0.1: v1(116.789,193.802) 116.434,194.158 116.434,194.793 116.637,194.996 124.562,194.996 127,197.434 133.714,197.434 SCU_FPGA_H_A.37@135,198.72
H_FPGA_BUS0: SCU.C2 SCU_FPGA_H_B.1 | length 65.3
  Top Layer w0.1: v1(108.596,193.802) 110.398,193.802 SCU.C2@110.8,193.4
  Mid-Layer 2 w0.1: v1(108.596,193.802) 108.565,193.771 108.565,192.634 108.674,192.525 109.811,192.525 110.038,192.298 110.038,188.646 110.089,188.595 110.617,188.595 110.846,188.366 110.846,184.912 114.706,181.051 114.706,171.374 129.565,156.515 135.929,156.515 136.387,156.058 136.387,152.843 137.668,151.562 139.562,151.562 SCU_FPGA_H_B.1@141,153
H_FPGA_BUS1: SCU.C1 SCU_FPGA_H_B.3 | length 60.7
  Top Layer w0.1: v1(108.031,193.4) SCU.C1@110,193.4
  Mid-Layer 4 w0.1: v1(108.031,193.4) 107.727,193.096 107.727,192.25 108.026,191.951 108.026,177.876 131.267,154.635 140.095,154.635 SCU_FPGA_H_B.3@141,155.54
H_FPGA_BUS2: SCU.D2 SCU_FPGA_H_B.5 | length 54.9
  Top Layer w0.1: v1(110.392,193.015) 110.392,193.008 SCU.D2@110.8,192.6
  Mid-Layer 2 w0.1: v1(110.392,193.015) 110.849,192.557 112.903,192.557 114.757,190.703 114.757,187.02 115.011,186.766 116.332,186.766 116.967,186.131 116.967,183.286 119.786,180.467 119.786,173.33 130.861,162.255 138.862,162.255 139.37,161.747 139.37,159.71 SCU_FPGA_H_B.5@141,158.08
H_FPGA_BUS3: SCU.D1 SCU_FPGA_H_B.7 | length 56.1
  Top Layer w0.1: v1(108.152,192.525) 108.227,192.6 SCU.D1@110,192.6
  Mid-Layer 4 w0.1: v1(108.152,192.525) 109.397,192.525 110.033,191.889 110.033,189.586 110.261,189.357 111.354,189.357 111.633,189.078 111.633,184.023 125.832,169.824 136.144,169.824 136.906,169.062 136.906,164.541 137.363,164.084 139.548,164.084 139.827,163.805 139.827,161.793 SCU_FPGA_H_B.7@141,160.62
H_FPGA_BUS4: SCU.E3 SCU_FPGA_H_B.9 | length 48.9
  Top Layer w0.1: v1(111.201,192.202) 111.404,191.999 111.6,191.999 SCU.E3@111.6,191.8
  Mid-Layer 4 w0.1: v1(111.201,192.202) 111.354,192.202 111.76,191.795 112.166,191.795 112.446,191.516 112.446,185.877 126.568,171.755 135.763,171.755 137.292,170.226 137.292,164.912 137.77,164.435 139.725,164.435 SCU_FPGA_H_B.9@141,163.16
H_FPGA_BUS5: SCU.E2 SCU_FPGA_H_B.11 | length 59.5
  Top Layer w0.1: v1(110.388,192.202) 110.398,192.202 SCU.E2@110.8,191.8 ; SCU_FPGA_H_B.11@141,165.7 141.91,166.61 141.91,192.227 v1(141.707,192.43)
  Mid-Layer 1 w0.1: v1(110.388,192.202) 110.795,192.608 120.447,192.608 120.828,192.227 127.815,192.227 128.045,192.458 141.679,192.458 v1(141.707,192.43)
H_FPGA_BUS6: SCU.E1 SCU_FPGA_H_B.13 | length 55.6
  Top Layer w0.1: v1(109.048,191.8) SCU.E1@110,191.8
  Mid-Layer 1 w0.1: v1(109.048,191.8) 109.048,189.586 109.195,189.439 117.963,189.439 118.104,189.58 v1(131.095,189.58)
  Mid-Layer 2 w0.1: v1(131.095,189.58) 131.195,189.48 139.396,189.48 139.9,188.976 139.9,187.46 140.081,187.279 140.081,169.159 SCU_FPGA_H_B.13@141,168.24
H_FPGA_BUS7: SCU.H4 SCU_FPGA_H_B.15 | length 41.8
  Top Layer w0.1: v1(111.989,189.001) 112.001,189.001 SCU.H4@112.4,189.4
  Mid-Layer 3 w0.1: v1(111.989,189.001) 113.487,190.5 117.577,190.5 128.753,179.324 133.477,179.324 133.985,178.816 133.985,172.944 134.518,172.41 139.37,172.41 SCU_FPGA_H_B.15@141,170.78
H_FPGA_BUS8: SCU.H5 SCU_FPGA_H_B.17 | length 36.7
  Top Layer w0.1: SCU.H5@113.2,189.4 v1(113.589,189.011)
  Mid-Layer 4 w0.1: v1(113.589,189.011) 114.03,188.57 116.992,188.57 117.196,188.366 117.196,184.506 127.386,174.315 140.005,174.315 SCU_FPGA_H_B.17@141,173.32
H_FPGA_BUS9: SCU.J5 SCU_FPGA_H_B.19 | length 40.6
  Top Layer w0.1: v1(112.801,188.999) SCU.J5@113.2,188.6
  Mid-Layer 4 w0.1: v1(112.801,188.999) 112.801,189.586 113.386,190.17 119.255,190.17 131.924,177.5 135.666,177.5 137.846,179.68 141.453,179.68 141.91,179.222 141.91,176.77 SCU_FPGA_H_B.19@141,175.86
H_FPGA_BUS10: SCU.J6 SCU_FPGA_H_B.21 | length 35
  Top Layer w0.1: v1(113.589,188.189) SCU.J6@114,188.6
  Mid-Layer 4 w0.1: v1(113.589,188.189) 113.233,188.544 113.233,189.179 113.436,189.382 117.246,189.382 117.983,188.646 119.843,188.646 131.189,177.3 139.9,177.3 SCU_FPGA_H_B.21@141,178.4
H_FPGA_BUS11: SCU.K5 SCU_FPGA_H_B.23 | length 39.4
  Top Layer w0.1: v1(112.801,187.401) 113.005,187.604 113.2,187.604 SCU.K5@113.2,187.8
  Mid-Layer 1 w0.1: v1(112.801,187.401) 112.446,187.757 110.236,187.757 110.033,187.554 110.033,184.099 111.125,183.007 122.911,183.007 124.054,181.864 140.076,181.864 SCU_FPGA_H_B.23@141,180.94
H_FPGA_BUS12: SCU.J4 SCU_FPGA_H_B.25 | length 37.3
  Top Layer w0.1: v1(111.989,188.189) 112.192,188.392 112.4,188.392 SCU.J4@112.4,188.6
  Mid-Layer 1 w0.1: v1(111.989,188.189) 112.395,188.595 130.683,188.595 131.572,189.484 141.427,189.484 141.91,189.001 141.91,184.39 SCU_FPGA_H_B.25@141,183.48
H_FPGA_BUS13: SCU.K3 SCU_FPGA_H_B.27 | length 33.3
  Top Layer w0.1: v1(111.201,187.401) SCU.K3@111.6,187.8
  Mid-Layer 1 w0.1: v1(111.201,187.401) 110.846,187.046 110.846,185.979 111.1,185.725 130.505,185.725 131.7,186.92 140.1,186.92 SCU_FPGA_H_B.27@141,186.02
H_FPGA_BUS14: SCU.L3 SCU_FPGA_H_B.29 | length 31.2
  Top Layer w0.1: v1(111.201,186.588) 111.201,186.601 SCU.L3@111.6,187
  Mid-Layer 1 w0.1: v1(111.201,186.588) 111.435,186.823 131.188,186.823 131.485,187.12 139.56,187.12 SCU_FPGA_H_B.29@141,188.56
H_FPGA_BUS15: SCU.B1 SCU_FPGA_H_B.31 | length 36.3
  Top Layer w0.1: v1(109.601,194.589) 109.611,194.589 SCU.B1@110,194.2
  Mid-Layer 1 w0.1: v1(109.601,194.589) 109.601,191.618 110.312,190.906 126.894,190.906 128.245,192.258 139.842,192.258 SCU_FPGA_H_B.31@141,191.1
H_FPGA_ENABLE: SCU.A4 SCU_FPGA_H_B.35 | length 30.2
  Top Layer w0.1: SCU.A4@112.4,195 v1(112.4,195.75)
  Mid-Layer 1 w0.1: v1(112.4,195.75) 115.349,195.75 115.545,195.555 116.23,195.555 116.586,195.91 119.482,195.91 120.117,195.275 140.095,195.275 SCU_FPGA_H_B.35@141,196.18
H_FPGA_LBUB: SCU.D9 SCU_FPGA_H_A.39 | length 22.2
  Top Layer w0.1: SCU.D9@116.4,192.6 v1(116.789,192.989)
  Mid-Layer 3 w0.1: v1(116.789,192.989) 117.196,193.396 120.498,193.396 127.102,200 133.74,200 SCU_FPGA_H_A.39@135,201.26
H_FPGA_PROCEN: SCU.J3 SCU_FPGA_H_C.1 | length 59.3
  Top Layer w0.1: v1(111.201,188.201) SCU.J3@111.6,188.6
  Mid-Layer 4 w0.1: v1(111.201,188.201) 110.833,187.833 110.312,187.833 109.83,187.35 109.83,181.737 129.311,162.255 136.169,162.255 137.135,161.29 137.135,157.277 137.592,156.82 143.18,156.82 SCU_FPGA_H_C.1@147,153
H_FPGA_STATE_0: SCU.C4 SCU_FPGA_H_B.37 | length 38.1
  Top Layer w0.1: v1(111.989,193.802) 111.998,193.802 SCU.C4@112.4,193.4
  Mid-Layer 1 w0.1: v1(111.989,193.802) 112.344,193.446 129.311,193.446 130.023,192.735 141.453,192.735 141.503,192.786 142.24,192.786 142.672,193.218 142.672,197.048 SCU_FPGA_H_B.37@141,198.72
H_FPGA_STATE_1: SCU.H3 SCU_FPGA_H_B.39 | length 36.7
  Top Layer w0.1: v1(111.201,189.001) SCU.H3@111.6,189.4
  Mid-Layer 3 w0.1: v1(111.201,189.001) 111.582,189.382 111.582,191.618 111.785,191.821 124.231,191.821 132.055,199.644 139.384,199.644 SCU_FPGA_H_B.39@141,201.26
H_FPGA_WRITE: SCU.B4 SCU_FPGA_H_B.33 | length 30.3
  Top Layer w0.1: v1(111.989,194.589) 112.011,194.589 SCU.B4@112.4,194.2
  Mid-Layer 1 w0.1: v1(111.989,194.589) 112.344,194.234 130.429,194.234 130.759,194.564 140.076,194.564 SCU_FPGA_H_B.33@141,193.64
H_LED0: SCU.L1 SCU_LED_H.1 | length 62.2
  Top Layer w0.1: SCU_LED_H.1@107.2,127.3 108.102,128.202 108.102,132.436 106.45,134.088 106.45,183.45 SCU.L1@110,187
H_LED1: SCU.L5 SCU_LED_H.3 | length 63.7
  Top Layer w0.1: SCU_LED_H.3@109.74,127.3 108.839,128.201 108.839,132.639 106.65,134.828 106.65,171.699 113.2,178.249 SCU.L5@113.2,187
H_LED2: SCU.L6 SCU_LED_H.5 | length 65.9
  Top Layer w0.1: SCU_LED_H.5@112.28,127.3 113.182,128.202 113.182,133.223 108.534,137.871 108.534,150.165 109.957,151.587 112.801,151.587 113.208,151.994 113.208,175.59 114,176.382 SCU.L6@114,187
H_LED3: SCU.D3 SCU_LED_H.7 | length 79.4
  Top Layer w0.1: v1(111.201,192.989) 111.211,192.989 SCU.D3@111.6,192.6 ; SCU_LED_H.7@114.82,127.3 115.73,126.39 118.262,126.39 118.567,126.695 118.567,187.046 118.897,187.376 118.923,187.35 v1(118.975,187.35)
  Mid-Layer 3 w0.1: v1(111.201,192.989) 110.769,192.557 110.769,188.773 110.973,188.57 118.491,188.57 118.897,188.163 118.897,187.376 118.923,187.35 v1(118.975,187.35)
H_LED4: SCU.L11 SCU_LED_H.9 | length 60.2
  Top Layer w0.1: SCU_LED_H.9@117.36,127.3 118.262,128.202 118.262,186.738 SCU.L11@118,187
H_LED5: SCU.J9 SCU_LED_H.11 | length 64.7
  Top Layer w0.1: SCU.J9@116.4,188.6 v1(116.789,188.211) ; v1(118.948,185.242) 118.77,185.064 118.77,128.43 SCU_LED_H.11@119.9,127.3
  Mid-Layer 3 w0.1: v1(116.408,185.242) v1(118.948,185.242)
  Mid-Layer 4 w0.1: v1(116.408,185.242) 116.408,187.83 v1(116.789,188.211)
H_LED6: SCU.J10 SCU_LED_H.13 | length 64.6
  Top Layer w0.1: SCU.J10@117.2,188.6 117.586,188.214 119.507,188.214 120.04,187.681 120.04,147.98 121.183,146.837 121.183,128.557 SCU_LED_H.13@122.44,127.3
H_LED7: SCU.J11 SCU_LED_H.15 | length 65.8
  Top Layer w0.1: SCU.J11@118,188.6 118.256,188.6 118.406,188.45 120.973,188.45 123.698,185.725 123.698,128.582 SCU_LED_H.15@124.98,127.3
H_LED8: SCU.H9 SCU_LED_H.17 | length 69.5
  Top Layer w0.1: SCU.H9@116.4,189.4 116.4,189.205 v1(116.789,189.001)
  Bottom Layer w0.1: v1(116.789,189.001) 116.629,189.085 116.357,189.357 115.824,189.357 115.646,189.179 115.646,181.839 116.84,180.645 116.84,172.06 128.422,160.477 128.422,128.202 SCU_LED_H.17@127.52,127.3
H_LED9: SCU.H10 SCU_LED_H.19 | length 71.7
  Top Layer w0.1: SCU.H10@117.2,189.4 117.624,188.976 118.387,188.976 118.699,188.664 121.267,188.664 124.079,185.852 124.079,129.235 124.765,128.549 128.811,128.549 SCU_LED_H.19@130.06,127.3
H_LED10: SCU.H11 SCU_LED_H.21 | length 69.9
  Top Layer w0.1: SCU.H11@118,189.4 118.575,189.4 119.101,188.874 121.564,188.874 125.146,185.293 125.146,148.615 127.051,146.71 127.051,136.474 131.318,132.207 131.318,128.582 SCU_LED_H.21@132.6,127.3
H_LED11: SCU.H8 SCU_LED_H.23 | length 71.2
  Top Layer w0.1: SCU.H8@115.6,189.4 v1(116.002,188.998)
  Bottom Layer w0.1: v1(116.002,188.998) 116.357,188.643 116.357,186.309 116.053,186.004 116.053,181.839 118.669,179.222 118.669,172.644 130.404,160.909 130.404,144.551 136.042,138.913 136.042,128.202 SCU_LED_H.23@135.14,127.3
H_LED12: SCU.D6 SCU_LED_H.25 | length 82.7
  Top Layer w0.1: SCU.D6@114,192.6 114.402,192.198 114.402,190.805 114.605,190.602 119.126,190.602 119.964,189.763 125.578,189.763 126.187,189.154 126.187,174.219 130.759,169.647 133.502,169.647 134.087,169.062 134.087,134.95 136.779,132.258 136.779,128.201 SCU_LED_H.25@137.68,127.3
H_LED13: SCU.A5 SCU_LED_H.27 | length 91.3
  Top Layer w0.1: v1(112.801,195.377) 112.823,195.377 SCU.A5@113.2,195
  Mid-Layer 2 w0.1: v1(112.801,195.377) 112.522,195.097 111.989,195.097 111.557,194.666 111.557,194.437 111.354,194.234 111.023,194.234 110.761,194.497 110.761,194.827 110.642,194.945 107.696,194.945 107.036,194.285 107.036,165.125 129.235,142.926 129.235,136.83 133.858,132.207 133.858,128.829 134.341,128.346 139.174,128.346 SCU_LED_H.27@140.22,127.3
H_LED14: SCU.B5 SCU_LED_H.29 | length 89.2
  Top Layer w0.1: v1(112.801,194.589) 112.811,194.589 SCU.B5@113.2,194.2
  Mid-Layer 2 w0.1: v1(112.801,194.589) 112.344,194.132 112.344,193.65 112.065,193.37 110.089,193.37 109.25,194.208 108.102,194.208 107.671,193.777 107.671,179.553 108.966,178.257 108.966,165.506 134.417,140.056 134.417,135.941 139.319,131.039 139.319,128.651 139.751,128.219 141.841,128.219 SCU_LED_H.29@142.76,127.3
H_LED15: SCU.C5 SCU_LED_H.31 | length 92.4
  Top Layer w0.1: v1(112.801,193.802) 113.005,193.599 113.2,193.599 SCU.C5@113.2,193.4 ; v1(130.708,179.908) 135.331,179.908 135.915,179.324 135.915,134.112 136.474,133.553 141.021,133.553 141.478,133.096 141.478,126.797 142.215,126.06 144.06,126.06 SCU_LED_H.31@145.3,127.3
  Mid-Layer 4 w0.1: v1(112.801,193.802) 112.801,193.65 115.722,190.729 119.247,190.729 119.487,190.969 120.023,190.969 130.708,180.284 v1(130.708,179.908)
H_SD_CLK: SCU.B2 SCU_SD_H.3 | length 18.5
  Top Layer w0.1: v1(110.411,194.589) SCU.B2@110.8,194.2
  Mid-Layer 4 w0.1: SCU_SD_H.3@96,203.24 104.244,194.996 110.004,194.996 v1(110.411,194.589)
H_SD_CS: SCU.A3 SCU_SD_H.1 | length 23.3
  Top Layer w0.1: v1(111.198,195.402) SCU.A3@111.6,195
  Mid-Layer 1 w0.1: SCU_SD_H.1@96,200.7 95.098,199.798 95.098,194.996 95.504,194.589 105.131,194.589 105.771,195.23 111.026,195.23 v1(111.198,195.402)
H_SD_DI: SCU.A1 SCU_SD_H.7 | length 19.7
  Top Layer w0.1: v1(109.601,195.783) 109.601,195.399 SCU.A1@110,195
  Mid-Layer 4 w0.1: SCU_SD_H.7@96,208.32 97.064,208.32 v1(109.601,195.783)
H_SD_DO: SCU.A2 SCU_SD_H.5 | length 19.6
  Top Layer w0.1: v1(110.388,195.615) 110.388,195.412 SCU.A2@110.8,195
  Mid-Layer 4 w0.1: SCU_SD_H.5@96,205.78 106.368,195.412 110.185,195.412 v1(110.388,195.615)
H_USB_DM: SCU.A10 SCU_USB_H.3 | length 29.1
  Top Layer w0.1: SCU.A10@117.2,195 v1(117.2,196.621)
  Mid-Layer 3 w0.1: SCU_USB_H.3@96,190.54 97.13,191.67 97.13,197.079 97.434,197.383 116.438,197.383 v1(117.2,196.621)
H_USB_DP: SCU.A11 SCU_USB_H.5 | length 23.9
  Top Layer w0.1: SCU.A11@118,195 118.389,195.389 v1(118.389,195.402)
  Mid-Layer 1 w0.1: SCU_USB_H.5@96,193.08 106.923,193.08 108.864,195.021 116.934,195.021 117.315,195.402 v1(118.389,195.402)
H_USB_ID: SCU.A8 SCU_USB_H.7 | length 21.8
  Top Layer w0.1: SCU.A8@115.6,195 116.002,195.402 v1(116.002,195.953)
  Mid-Layer 1 w0.1: SCU_USB_H.7@96,195.62 108.714,195.62 109.258,196.165 110.938,196.165 111.142,195.962 111.944,195.962 112.339,196.356 114.95,196.356 115.353,195.953 v1(116.002,195.953)
H_USB_VBUS_ENABLE: SCU.A7 SCU_USB_H.1 | length 24.1
  Top Layer w0.1: SCU.A7@114.8,195 v1(115.189,195.389)
  Mid-Layer 3 w0.1: SCU_USB_H.1@96,188 103.707,195.707 108.052,195.707 108.585,196.24 109.982,196.24 110.693,196.952 113.626,196.952 v1(115.189,195.389)
HEADER.DBG_SWCLK: SCU.E8 SCU_H.6 | length 38
  Top Layer w0.1: v1(115.198,192.202) SCU.E8@115.6,191.8
  Mid-Layer 2 w0.1: SCU_H.6@98.08,222.54 99.339,221.281 99.339,212.344 114.808,196.875 114.808,192.592 v1(115.198,192.202)
HEADER.DBG_SWDIO: SCU.D8 SCU_H.7 | length 34.2
  Top Layer w0.1: SCU.D8@115.6,192.6 v1(115.97,192.97)
  Mid-Layer 4 w0.1: SCU_H.7@100.62,220 114.808,205.812 114.808,193.573 115.011,193.37 115.57,193.37 v1(115.97,192.97)
HEADER.DBG_SWO: SCU.C8 SCU_H.8 | length 35.7
  Top Layer w0.1: SCU.C8@115.6,193.4 v1(116.002,193.802)
  Mid-Layer 2 w0.1: SCU_H.8@100.62,222.54 102.311,220.849 102.311,211.379 115.138,198.552 115.138,196.215 115.595,195.758 115.595,194.208 v1(116.002,193.802)
HEADER.USB_DM_PULLUP: SCU.K11 SCU_H.5 | length 61.2
  Top Layer w0.1: SCU.K11@118,187.8 118.389,187.411 v1(118.389,187.401)
  Mid-Layer 2 w0.1: SCU_H.5@98.08,220 97.155,220.925 97.155,228.397 97.663,228.905 98.476,228.905 98.984,228.397 98.984,227.482 103.099,223.368 103.099,215.748 117.551,201.295 117.551,195.555 117.221,195.224 117.221,191.96 117.335,191.846 117.805,191.846 118.389,191.262 v1(118.389,187.401)
HFXTAL.N: C15.2 SCU.L9 XTAL.1 | length 60
  Top Layer w0.1: C15.2@110,149.6 110,146.845 111.1,145.745 XTAL.1@111.1,143 111.1,141.757 111.354,141.503 116.23,141.503 117.475,142.748 117.475,185.925 SCU.L9@116.4,187
HFXTAL.P: C14.1 SCU.L8 XTAL.2 | length 46.9
  Top Layer w0.1: XTAL.2@114.9,143 114.9,145.745 116,146.845 C14.1@116,149.6 114.605,149.6 114.046,150.159 114.046,175.895 115.773,177.622 115.773,186.827 SCU.L8@115.6,187
INIT: FPGA.U3 R3.1 | length 28.3
  Top Layer w0.1: v1(177.698,159.461) 177.711,159.461 FPGA.U3@178.1,159.85 ; v1(200.762,155.45) R3.1@202,155.45
  Mid-Layer 1 w0.1: v1(177.698,159.461) 178.542,158.617 178.542,157.886 178.714,157.714 182.962,157.714 183.343,158.095 184.673,158.095 184.83,158.252 189.08,158.252 189.958,157.375 190.295,157.375 190.41,157.49 192.714,157.49 193.714,158.49 197.721,158.49 v1(200.762,155.45)
INST_MEM0.BUS0: FPGA.H16 MEM_IMEM0.7 | length 103.4
  Top Layer w0.1: MEM_IMEM0.7@142,135.7 142,138.125 v1(142.57,138.695) ; FPGA.H16@188.5,167.05 188.9,167.45 v1(188.9,167.462)
  Mid-Layer 1 w0.1: v1(142.57,138.695) 142.57,140.208 142.977,140.614 178.587,140.614 183.693,135.509 198.78,135.509 199.212,135.941 v1(199.212,149.835)
  Mid-Layer 2 w0.1: v1(188.9,167.462) 189.103,167.462 189.465,167.1 189.845,167.1 189.852,167.107 194.513,167.107 195.9,165.72 195.9,165.236 195.897,165.233 195.897,153.239 195.911,153.225 196.05,153.225 197.74,151.535 197.74,151.396 198.655,150.481 198.744,150.481 199.212,150.013 v1(199.212,149.835)
INST_MEM0.BUS1: FPGA.G16 MEM_IMEM0.8 | length 105.3
  Top Layer w0.1: MEM_IMEM0.8@142.8,135.7 142.8,134.847 v1(143.205,134.442) ; FPGA.G16@188.5,167.85 v1(188.9,168.25)
  Mid-Layer 1 w0.1: v1(143.205,134.442) 144.475,133.172 165.004,133.172 165.303,132.873 165.918,132.873 166.218,133.172 199.898,133.172 v1(203.2,136.474)
  Mid-Layer 2 w0.1: v1(188.9,168.25) 189.255,167.894 195.174,167.894 195.631,167.437 195.631,166.272 196.1,165.803 196.1,165.153 196.097,165.15 196.097,162.678 203.2,155.575 v1(203.2,136.474)
INST_MEM0.BUS2: FPGA.G18 MEM_IMEM0.9 | length 85.1
  Top Layer w0.1: MEM_IMEM0.9@143.6,135.7 v1(143.6,138.672) ; FPGA.G18@190.1,167.85 190.906,168.656 v1(191.11,168.656)
  Mid-Layer 1 w0.1: v1(143.6,138.672) 145.263,140.335 173.355,140.335 v1(174.955,138.735)
  Mid-Layer 3 w0.1: v1(174.955,138.735) 175.666,138.735 188.052,151.12 188.052,152.613 188.163,152.725 189.941,152.725 190.006,152.79 191.626,152.79 199.305,160.468 199.305,164.271 194.92,168.656 v1(191.11,168.656)
INST_MEM0.BUS3: FPGA.J13 MEM_IMEM0.10 | length 90.4
  Top Layer w0.1: v1(142.443,143.739) 144.4,141.782 MEM_IMEM0.10@144.4,135.7 ; FPGA.J13@186.1,166.25 186.487,166.637 v1(186.487,166.649)
  Mid-Layer 3 w0.1: v1(160.477,172.999) 162.255,174.777 177.832,174.777 179.966,172.644 189.992,172.644 190.119,172.517 190.119,171.911 190.73,171.3 190.777,171.3 190.856,171.221 190.856,170.459 190.068,169.672 190.068,167.208 189.96,167.1 189.555,167.1 189.548,167.107 188.252,167.107 188.245,167.1 187.955,167.1 187.948,167.107 186.944,167.107 v1(186.487,166.649)
  Bottom Layer w0.1: v1(142.443,143.739) 142.443,149.581 145.364,152.502 145.364,154.457 151.435,160.528 156.82,160.528 157.226,160.934 157.226,169.748 v1(160.477,172.999)
INST_MEM0.BUS4: FPGA.K14 MEM_IMEM0.13 | length 64.2
  Top Layer w0.1: MEM_IMEM0.13@146.8,135.7 146.8,136.55 147.054,136.804 147.193,136.804 147.175,136.822 147.175,136.925 v1(147.2,136.95) ; FPGA.K14@186.9,165.45 186.9,165.195 187.046,165.049 v1(187.3,165.049)
  Mid-Layer 3 w0.1: v1(147.2,136.95) 147.175,136.925 147.175,136.822 147.193,136.804 148.844,138.455 162.687,138.455 167.132,142.9 167.132,146.697 174.46,154.026 181.151,154.026 181.651,154.526 181.651,154.8 182.207,155.357 182.482,155.357 185.418,158.293 187.452,158.293 187.65,158.491 187.65,158.983 187.655,158.988 187.655,160.78 187.765,160.89 187.75,160.905 187.75,161.195 187.955,161.4 188.245,161.4 188.26,161.385 188.55,161.675 188.55,161.995 188.81,162.255 189.154,162.255 189.255,162.357 189.255,165.222 189.027,165.45 187.7,165.45 v1(187.3,165.049)
INST_MEM0.BUS5: FPGA.L12 MEM_IMEM0.14 | length 63.4
  Top Layer w0.1: MEM_IMEM0.14@147.6,135.7 v1(147.599,142.977) ; FPGA.L12@185.3,164.65 v1@185.7,165.05
  Mid-Layer 4 w0.1: v1(165.325,158.4) 165.258,158.4 165.252,158.394 172.693,158.394 173.736,157.352 174.845,157.352 176.063,156.134 178.892,156.134 v1(179.299,156.54)
  Bottom Layer w0.1: v1(147.599,142.977) 153.01,142.977 160.648,150.615 160.648,154.803 162.894,157.048 164.617,157.048 165.252,157.683 165.252,158.394 165.258,158.4 v1(165.325,158.4) ; v1(179.299,156.54) 180.543,157.785 180.543,161.366 180.645,161.468 183.539,161.468 183.759,161.688 183.759,161.978 183.744,161.993 183.744,162.052 183.899,162.208 183.899,163.049 183.949,163.099 184.336,163.099 184.562,163.325 184.562,163.594 184.843,163.875 185.268,163.875 185.268,164.668 v1@185.65,165.05
  other v1: 185.675,165.05
INST_MEM0.BUS6: FPGA.L13 MEM_IMEM0.15 | length 55.2
  Top Layer w0.1: MEM_IMEM0.15@148.4,135.7 v1(148.4,138.836) ; FPGA.L13@186.1,164.65 186.488,164.262 186.488,164.238 v1(186.5,164.25)
  Mid-Layer 3 w0.1: v1(148.4,138.836) 151.105,138.836 165.014,152.746 165.963,152.746 167.94,154.722 169.342,154.722 170.366,155.747 172.89,155.747 173.333,155.304 174.718,155.304 175.111,155.698 180.442,155.698 180.563,155.819 180.563,156.398 183.744,159.578 183.744,160.528 184.023,160.807 184.448,160.807 184.58,160.675 184.983,160.675 185.242,160.934 185.242,161.214 185.522,161.493 185.928,161.493 186.055,161.62 186.055,163.805 v1(186.5,164.25)
INST_MEM0.BUS7: FPGA.K15 MEM_IMEM0.16 | length 66.1
  Top Layer w0.1: v1(149.2,133.553) MEM_IMEM0.16@149.2,135.7 ; FPGA.K15@187.7,165.45 188.011,165.139 188.011,165.049 188.05,165.088 v1(188.05,165.1)
  Mid-Layer 3 w0.1: v1(149.2,133.553) 159.791,133.553 162.611,136.373 169.647,136.373 171.755,138.481 171.755,146.075 172.314,146.634 178.81,146.634 184.951,152.775 184.97,152.775 185.175,152.98 185.175,152.999 185.364,153.188 185.364,153.715 187,155.352 v1(187,155.4)
  Bottom Layer w0.1: v1(187,155.4) 187,155.352 189.255,157.607 189.255,164.49 189.128,164.617 188.443,164.617 188.011,165.049 188.05,165.088 v1(188.05,165.1)
INST_MEM0.BUS8: FPGA.K16 MEM_IMEM0.29 | length 54.3
  Top Layer w0.1: MEM_IMEM0.29@149.2,146.9 149.2,150.139 149.555,150.495 149.555,155.956 159.283,165.684 167.767,165.684 167.733,165.65 v1(167.65,165.65) ; FPGA.K16@188.5,165.45 v1(188.9,165.05)
  Mid-Layer 1 w0.1: v1(167.65,165.65) 167.733,165.65 167.767,165.684 167.823,165.628 179.584,165.628 179.857,165.355 179.857,164.795 179.984,164.668 188.443,164.668 188.824,165.05 v1(188.9,165.05)